# Altium PCB HMI MINI.PcbDoc
Units mm, origin at the board's own origin, x right, y up, seen from the top; angles counter-clockwise.
Board outline 60 x 15 mm, 4 copper layers (Top Layer, Layer 1, Layer 2, Bottom Layer), stack 1.513 mm thick; 36 components, 19 nets, 99 pads, 39 vias.
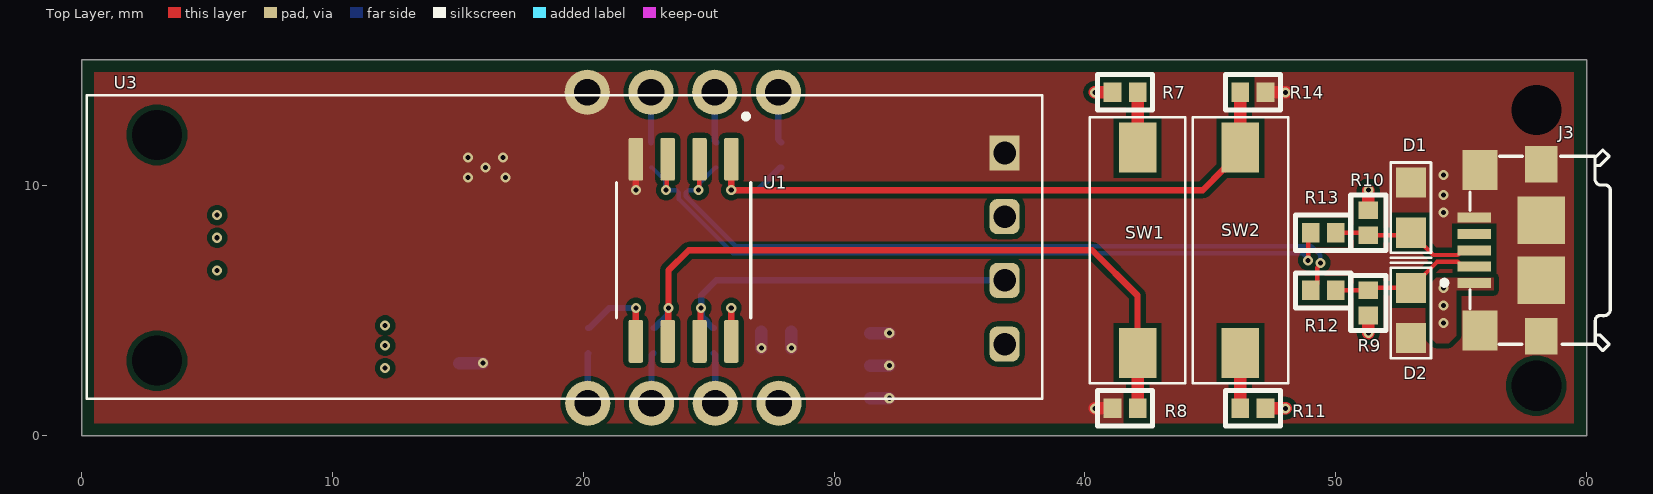
[diagram p0: Top Layer view]
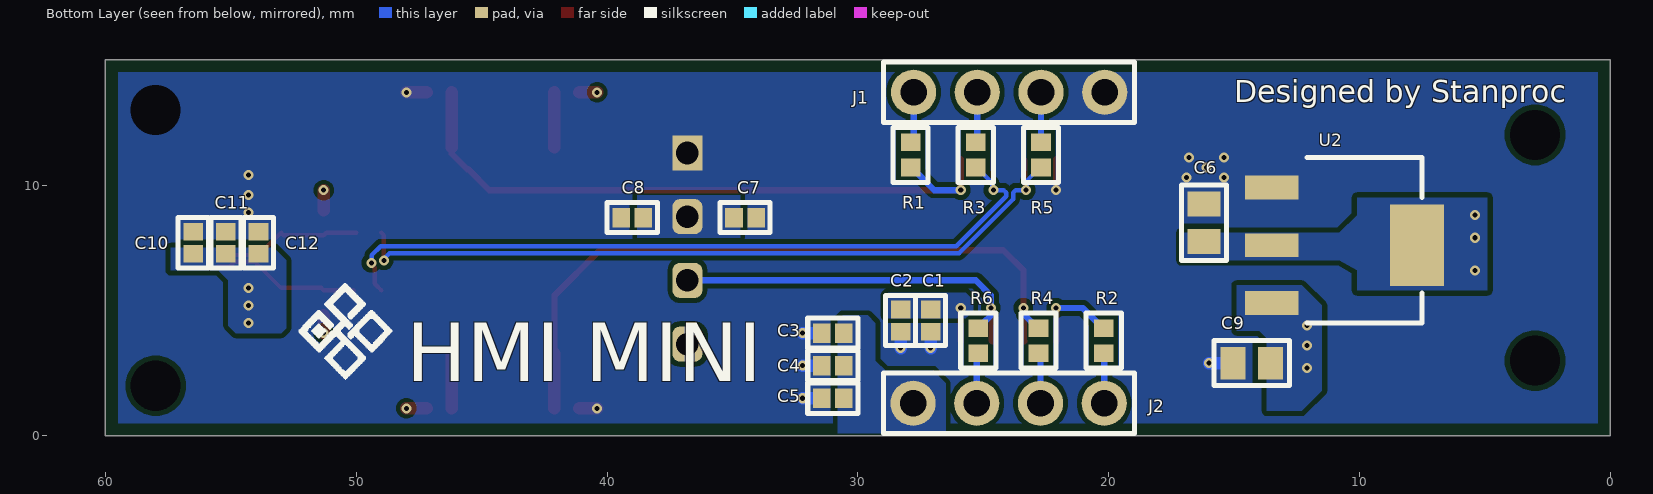
[diagram p1: Bottom Layer view, seen from below]
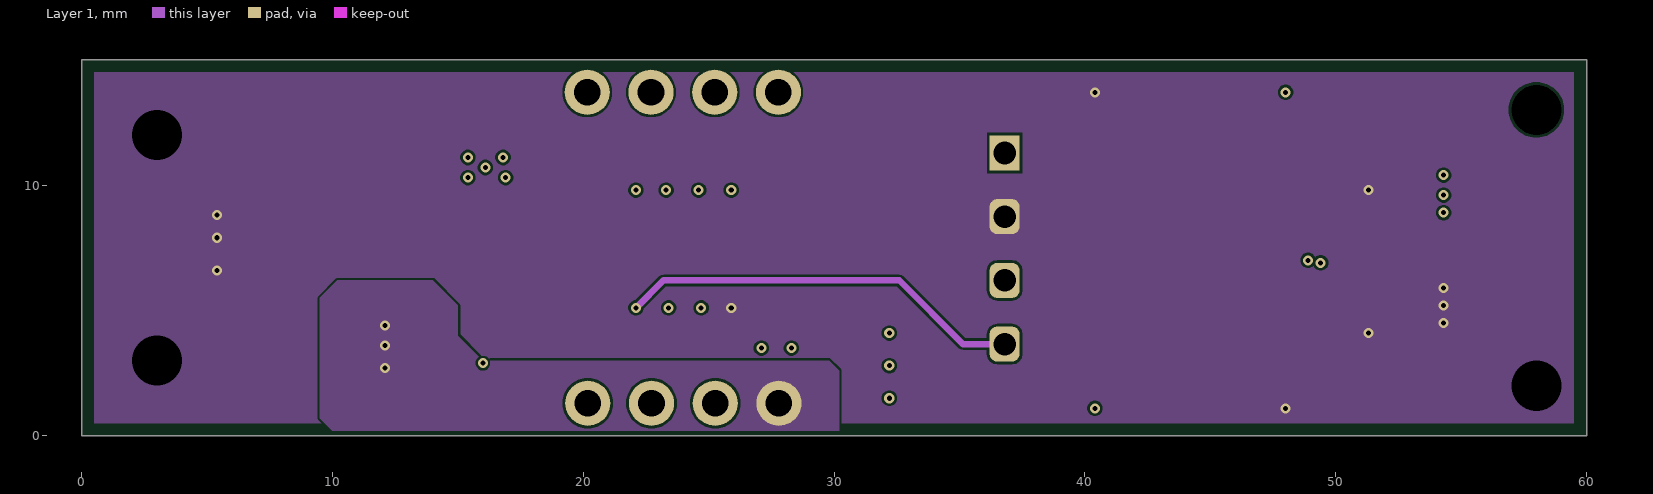
[diagram p2: Layer 1]
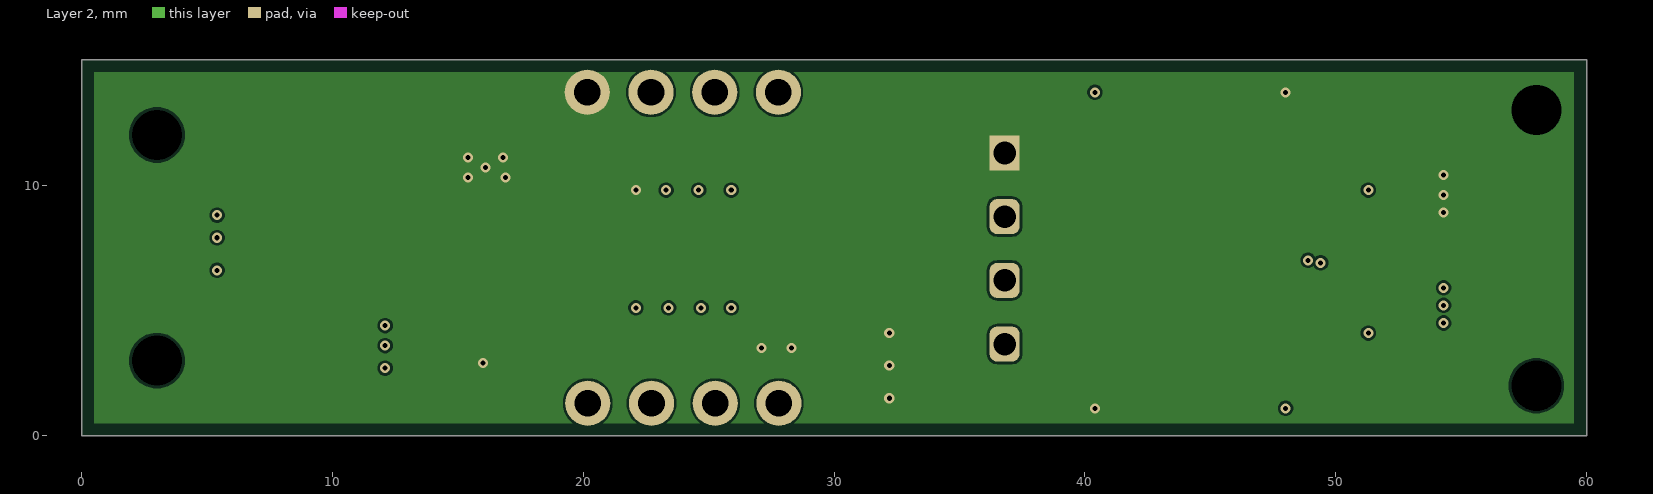
[diagram p3: Layer 2]
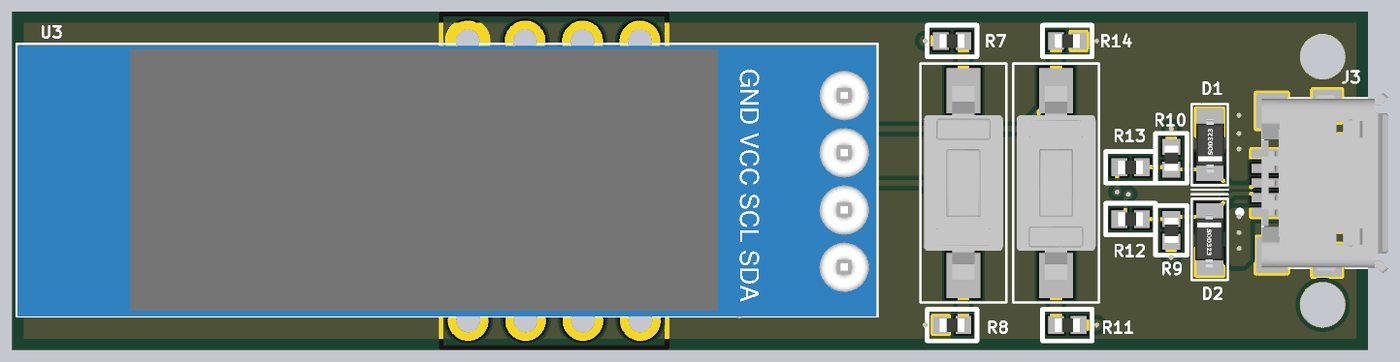
[diagram p4: 3D render of the assembled board from above, using the file's embedded part models]
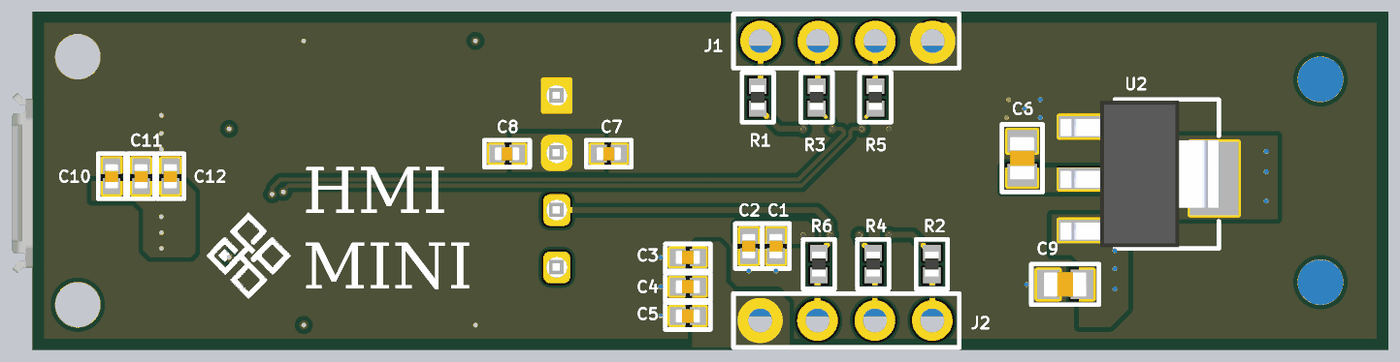
[diagram p5: 3D render of the assembled board from below, using the file's embedded part models]

## Layer stack, top to bottom
Top Solder: solder mask 0.0102, Solder Resist, Dk 3.5
Top Layer: signal copper 0.0356
Dielectric 2: prepreg 0.0711, PP-006, Dk 4.1
Layer 1: signal copper 0.0175
Dielectric 1: dielectric 1.265, FR-4, Dk 4.8
Layer 2: signal copper 0.0175
Dielectric 3: prepreg 0.0711, PP-006, Dk 4.1
Bottom Layer: signal copper 0.0356
Bottom Solder: solder mask 0.0102, Solder Resist, Dk 3.5

## Board outline
0,0 0,15 60,15 60,0

## Design rules (kind name [scope] priority, off if disabled: settings)
Clearance "TOP POLY" [InNamedPolygon('TOPGND')] p1: gap=0.2 ignorepadtopadclearanceinfootprint=FALSE
Clearance [All] p2: gap=0.1 ignorepadtopadclearanceinfootprint=FALSE
DiffPairsRouting [All] p1: maxlimit=0.101 minlimit=0.101 mostfreqgap=0.101 toplayer_minwidth=0.127 toplayer_maxwidth=0.175 toplayer_prefwidth=0.175 midlayer1_minwidth=0.127 midlayer1_maxwidth=0.175 midlayer1_prefwidth=0.175 midlayer2_minwidth=0.127 midlayer2_maxwidth=0.175 midlayer2_prefwidth=0.175 bottomlayer_minwidth=0.127 bottomlayer_maxwidth=0.175 bottomlayer_prefwidth=0.175 maxuncoupledlength=12.7
PolygonConnect [All] p1: connectstyle=Direct reliefconductorwidth=0.254 reliefentries=4 polygonreliefangle="90 Angle" airgapwidth=0.254
RoutingVias [All] p1: holewidth=0.711 width=1.27 viastyle="Through Hole" minholewidth=0.711 minwidth=1.27 maxholewidth=0.711 maxwidth=1.27
SolderMaskExpansion [All] p1: expansion=0.102 istentingtop=FALSE
Width [All] p1: maxlimit=5 minlimit=0.01 preferedwidth=0.254
29 further rules are at their usual default settings.

## Classes and differential pairs
net class USB: USB_N USB_P VUSB_N VUSB_P
differential pair VUSB: +VUSB_P -VUSB_N
differential pair USB: +USB_P -USB_N

## Components (designator, comment, footprint, x,y, rotation, side; value= is the part's Value field where it differs from the comment)
C1 "0.1uF(25V )" CAPACITOR_0402 27.1,4.6 r90 bottom
C2 "0.01uF(25V)" CAPACITOR_0402 28.3,4.6 r90 bottom
C3 "0.1uF(25V )" CAPACITOR_0402 31,4.1 r180 bottom
C4 "0.01uF(25V)" CAPACITOR_0402 31,2.8 r180 bottom
C5 "4.7uF(16V)" CAPACITOR_0402 31,1.5 r180 bottom
C6 "10uF(0603 in )" Capacitor_0603 16.2,8.5 r270 bottom
C7 "0.1uF(25V )" CAPACITOR_0402 34.5,8.7 r0 bottom
C8 "0.01uF(25V)" CAPACITOR_0402 39,8.7 r180 bottom
C9 "10uF(0603 in )" Capacitor_0603 14.3,2.9 r180 bottom
C10 "0.1uF(25V )" CAPACITOR_0402 56.5,7.7 r270 bottom
C11 "0.01uF(25V)" CAPACITOR_0402 55.2,7.7 r270 bottom
C12 "4.7uF(16V)" CAPACITOR_0402 53.9,7.7 r270 bottom
D1 "3.6V" SOD323_ZENER 53,9.1 r270 top
D2 "3.6V" SOD323_ZENER 53,4.9 r90 top
J1 "1x4HDR" P2.541X4HDR 27.78,13.7 r180 bottom
J2 "1x4HDR" P2.541X4HDR 20.18,1.3 r0 bottom
J3 "Micro USB" TE_1981568-1 58.2,7.4 r90 top
R1 "0R" RESISTOR_0402 27.9,11.2 r90 bottom
R2 "0R" RESISTOR_0402 20.2,3.8 r90 bottom
R3 "0R" RESISTOR_0402 25.3,11.2 r90 bottom
R4 "0R" RESISTOR_0402 22.8,3.8 r90 bottom
R5 "0R" RESISTOR_0402 22.7,11.2 r90 bottom
R6 "0R" RESISTOR_0402 25.2,3.8 r90 bottom
R7 "4.7K" RESISTOR_0402 41.6,13.7 r180 top
R8 "10K(0402 in )" RESISTOR_0402 41.6,1.1 r0 top
R9 "1.5K" RESISTOR_0402 51.3,5.3 r270 top
R10 "1.5K" RESISTOR_0402 51.3,8.5 r90 top
R11 "4.7K" RESISTOR_0402 46.7,1.1 r0 top
R12 "68R" RESISTOR_0402 49.5,5.8 r180 top
R13 "68R" RESISTOR_0402 49.5,8.1 r180 top
R14 "10K(0402 in )" RESISTOR_0402 46.7,13.7 r180 top
SW1 "Switch" Switch_2Lead 42.1,7.4 r90 top locked
SW2 "Switch" Switch_2Lead 46.2,7.4 r270 top locked
U1 "ATTINY85" SOIC127P798X216-8N 24,7.4 r270 top
U2 "5V REG" 4PIN-SOT 10.6,7.6 r270 bottom
U3 "I2C_OLED" "128X32 OLED" 36.8,11.28 r270 top

## Footprints (in the part's own frame and the unit in brackets; to place one, negate y for a bottom-side part, rotate by r counter-clockwise, add the part's x,y. Pads: shape width x height; smd on the part's side, far side on the other; paste and mask are expansions set on the pad)
4PIN-SOT [mm] "4 Pin Small Outline Package"
  rect 0.95x2.15 smd: 1(-2.3,-2.9) 2(0,-2.9) 3(2.3,-2.9)
  rect 3.25x2.15 smd: 4(0,2.9)
  silkscreen extent -3.5,-1.5 3.1,3.1, body extent -3.45,-3.9 3.05,3.1, height 1.8
"128X32 OLED" [mm]
  rect 1.4x1.2 hole 0.9: 1(0,0)
  rrect50% 1.4x1.2 hole 0.9: 2(2.54,0) 3(5.08,0) 4(7.62,0)
  silkscreen extent -2.3,-36.6 9.8,1.5, body extent -2.2,-36.57 9.8,1.43, height 7
CAPACITOR_0402 [mm] "0402 Capacitor"
  rect 0.7x0.78 smd: 1(-0.44,0) 2(0.44,0)
  silkscreen extent -1,-0.6 1,0.6, body extent -0.55,-0.3 0.55,0.3, height 0.5
Capacitor_0603 [mm] "Capacitor with 0603 (1608 Metric) Footprint"
  rect 1x1.3 smd: 1(-0.75,0) 2(0.75,0)
  silkscreen extent -1.5,-0.9 1.5,0.9, body extent -0.95,-0.55 0.95,0.55, height 0.8
P2.541X4HDR [mm]
  round 1.8 hole 1.06: 1(0,0) 2(2.54,0) 3(5.08,0) 4(7.62,0)
  silkscreen extent -1.2,-1.2 8.8,1.2
RESISTOR_0402 [mm] "0402 Resistor Package Footprint"
  rect 0.7x0.78 smd: 1(-0.5,0) 2(0.5,0)
  silkscreen extent -1.1,-0.7 1.1,0.7, body extent -0.55,-0.3 0.55,0.3, height 0.3
SOD323_ZENER [mm]
  rect 1.2x1.2 smd: 1(-1,0) 2(1,0)
  silkscreen extent -1.8,-0.8 2,0.8, body extent -1.25,-0.6 1.25,0.65, height 0.9
SOIC127P798X216-8N [mm]
  rrect25% 1.71x0.58 smd: 1(-3.63,1.905) 2(-3.63,0.635) 3(-3.63,-0.635) 4(-3.63,-1.905) 5(3.63,-1.905) 6(3.63,-0.635) 7(3.63,0.635) 8(3.63,1.905)
  silkscreen extent -5.44,-2.68 2.7,2.68, body extent -4.2,-2.69 4.2,2.69, height 2.3
Switch_2Lead [mm]
  rect 2x1.5 smd: 1(-4.1,0) 2(4.1,0)
  silkscreen extent -5.3,-1.9 5.3,1.9, body extent -4.3,-1.75 4.3,1.75, height 4.3
TE_1981568-1 [mm]
  rect 0.4x1.35 smd: 1(-1.3,2.675) 2(-0.65,2.675) 3(0,2.675) 4(0.65,2.675) 5(1.3,2.675)
  rect 1.6x1.4 smd: 6(-3.2,2.45) 7(3.2,2.45)
  rect 1.45x1.3 smd: 8(3.425,0) 9(-3.425,0)
  rect 1.9x1.9 smd: 10(-1.2,0) 11(1.2,0)
  silkscreen extent -4,-2.75 4,3.97, body extent -4,-2.7 4,2.9, height 2.82

## Part data
C1 C3 C7 C10: library part GRM155R71E104KE14J, "0.1µF ±10% 25V Ceramic Capacitor X7R 0402 (1005 Metric)", Manufacturer="Murata Electronics", MaxTemp=125°C, MinTemp=-55°C, SupplierPartNumber=490-14603-1-ND, ComponentLink1Description=SupplierURL, ComponentLink1URL=https://www.digikey.com/en/products/detail/murata-electronics/GRM155R71E104KE14J/4905174, ManufacturerPartNumber=GRM155R71E104KE14J, PartStatus=Active, Price=0.10, Supplier=Digikey
C2 C4 C8 C11: library part C0402C103J3RACTU, "10000pF ±5% 25V Ceramic Capacitor X7R 0402 (1005 Metric)", Manufacturer=KEMET, MaxTemp=125°C, MinTemp=-55°C, SupplierPartNumber=399-1279-1-ND, ComponentLink1Description=SupplierURL, ComponentLink1URL=https://www.digikey.com/en/products/detail/kemet/C0402C103J3RACTU/416042, ManufacturerPartNumber=C0402C103J3RACTU, PartStatus=Active, Price=0.10, Supplier=Digikey
C5 C12: library part 0402YD475MAT2A, "4.7µF ±20% 16V Ceramic Capacitor X5R 0402 (1005 Metric)", Manufacturer="AVX Corporation", MaxTemp=85°C, MinTemp=-55°C, SupplierPartNumber=478-10788-1-ND, ComponentLink1Description=SupplierURL, ComponentLink1URL=https://www.digikey.com/en/products/detail/avx-corporation/0402YD475MAT2A/6221357, ManufacturerPartNumber=0402YD475MAT2A, PartStatus=Active, Price=0.29, Supplier=Digikey
C6 C9: library part GRM188R61E106KA73D, "10µF ±10% 25V Ceramic Capacitor X5R 0603 (1608 Metric)", Manufacturer="Murata Electronics", MaxTemp=85°C, MinTemp=-55°C, SupplierPartNumber=490-18214-1-ND, ComponentLink1Description=SupplierURL, ComponentLink1URL=https://www.digikey.com/en/products/detail/murata-electronics/GRM188R61E106KA73D/9867922, ManufacturerPartNumber=GRM188R61E106KA73D, PartStatus=Active, Price=0.32, Supplier=Digikey
D1 D2: library part BZM55B3V6-TR, "Zener Diode 3.6V 500mW  Surface Mount MicroMELF", Manufacturer="Vishay General Semiconductor - Diodes Division", MaxTemp=175°C, MinTemp=-65°C, SupplierPartNumber=112-BZM55B3V6-CT-ND, ComponentLink1Description=SupplierURL, ComponentLink1URL=https://www.digikey.com/en/products/detail/vishay-general-semiconductor-diodes-division/BZM55B3V6-TR/4830627, ManufacturerPartNumber=BZM55B3V6-TR, PartStatus=Active, Price=0.28, Supplier=Digikey
J1 J2: library part PEC04SAAN, "Connector Header Through Hole 4 position 0.100\" (2.54mm)", MaxTemp=125°C, MinTemp=-65°C, SupplierPartNumber=S1012E-04-ND, ComponentLink1Description=SupplierURL, ComponentLink1URL=https://www.digikey.com/en/products/detail/sullins-connector-solutions/PEC04SAAN/859157, Maanufacturer="Sullins Connector Solutions", ManufacturerPartNumber=PEC04SAAN, PartStatus=Active, Price=0.27, Supplier=Digikey
J3: library part 1981568-1, "USB - micro B USB 2.0 Receptacle Connector 5 Position Surface Mount, Right Angle", Manufacturer="TE Connectivity AMP Connectors", MaxTemp=85°C, MinTemp=-30°C, SupplierPartNumber=A97800CT-ND, ComponentLink1Description=SupplierURL, ComponentLink1URL=https://www.digikey.com/en/products/detail/te-connectivity-amp-connectors/1981568-1/1786248, ManufacturerPartNumber=1981568-1, PartStatus=Active, Price=1.71, Supplier=Digikey
R1 R2 R3 R4 R5 R6: library part CR0402AJ/-000GAS, "Jumper 0.063W, 1/16W Chip Resistor 0402 (1005 Metric) Anti-Sulfur, Automotive AEC-Q200, Moisture Resistant Thick Film", Manufacturer="Bourns Inc.", MaxTemp=155°C, MinTemp=-55°C, SupplierPartNumber=CR0402AJ/-000GASCT-ND, ComponentLink1Description=SupplierURL, ComponentLink1URL=https://www.digikey.com/en/products/detail/bourns-inc/CR0402AJ-000GAS/10240110, ManufacturerPartNumber=CR0402AJ/-000GAS, PartStatus=Active, Price=0.10, Supplier=Digikey
R7 R11: library part ERJ-U02J472X, "4.7 kOhms ±5% 0.1W, 1/10W Chip Resistor 0402 (1005 Metric) Anti-Sulfur, Automotive AEC-Q200 Thick Film", Manufacturer="Panasonic Electronic Components", MaxTemp=155°C, MinTemp=-55°C, SupplierPartNumber=10-ERJ-U02J472XCT-ND, ComponentLink1Description=SupplierURL, ComponentLink1URL=https://www.digikey.com/en/products/detail/panasonic-electronic-components/ERJ-U02J472X/11631055, ManufacturerPartNumber=ERJ-U02J472X, PartStatus=Active, Price=0.10, Supplier=Digikey
R8 R14: library part ERJ-U02J103X, "10 kOhms ±5% 0.1W, 1/10W Chip Resistor 0402 (1005 Metric) Anti-Sulfur, Automotive AEC-Q200 Thick Film", Manufacturer="Panasonic Electronic Components", MaxTemp=155°C, MinTemp=-55°C, SupplierPartNumber=10-ERJ-U02J103XCT-ND, ComponentLink1Description=SupplierURL, ComponentLink1URL=https://www.digikey.com/en/products/detail/panasonic-electronic-components/ERJ-U02J103X/11631335, ManufacturerPartNumber=ERJ-U02J103X, PartStatus=Active, Price=0.10, Supplier=Digikey
R9 R10: library part ERJ-U02J152X, "1.5 kOhms ±5% 0.1W, 1/10W Chip Resistor 0402 (1005 Metric) Anti-Sulfur, Automotive AEC-Q200 Thick Film", Manufacturer="Panasonic Electronic Components", MaxTemp=155°C, MinTemp=-55°C, SupplierPartNumber=10-ERJ-U02J152XCT-ND, ComponentLink1Description=SupplierURL, ComponentLink1URL=https://www.digikey.com/en/products/detail/panasonic-electronic-components/ERJ-U02J152X/11634723, ManufacturerPartNumber=ERJ-U02J152X, PartStatus=Active, Price=0.10, Supplier=Digikey
R12 R13: library part CRGCQ0402J68R, "68 Ohms ±5% 0.063W, 1/16W Chip Resistor 0402 (1005 Metric) Automotive AEC-Q200, Moisture Resistant Thick Film", Manufacturer="TE Connectivity Passive Product", MaxTemp=155°C, MinTemp=-55°C, SupplierPartNumber=A130041CT-ND, ComponentLink1Description=SupplierURL, ComponentLink1URL=https://www.digikey.com/en/products/detail/te-connectivity-passive-product/CRGCQ0402J68R/8576643, ManufacturerPartNumber=CRGCQ0402J68R, PartStatus=Active, Price=0.10, Supplier=Digikey
SW1 SW2: library part "PTS636 SK50 SMTR LFS", "Tactile Switch SPST-NO Top Actuated Surface Mount", Manufacturer=C&K, MaxTemp=70°C, MinTemp=-20°C, SupplierPartNumber=CKN12315-1-ND, ComponentLink1Description=SupplierURL, ComponentLink1URL=https://www.digikey.com/en/products/detail/c-k/PTS636-SK50-SMTR-LFS/10071728, ManufacturerPartNumber="PTS636 SK50 SMTR LFS", PartStatus=Active, Price=0.12, Supplier=Digikey
U1: library part ATTINY85V-10SU, "AVR series Microcontroller IC 8-Bit 10MHz 8KB (4K x 16) FLASH 8-SOIC", Manufacturer="Microchip Technology", MaxTemp=85°C, MinTemp=-40°C, SupplierPartNumber=ATTINY85V-10SU-ND, ComponentLink1Description=SupplierURL, ComponentLink1URL=https://www.digikey.com/en/products/detail/microchip-technology/ATTINY85V-10SU/735472, ManufacturerPartNumber=ATTINY85V-10SU, PartSatus=Active, Price=1.31, Supplier=Digikey
U2: library part LM1117IMP-5.0/NOPB, "Linear Voltage Regulator IC Positive Fixed 1 Output  800mA SOT-223", Manufacturer="Texas Instruments", MaxTemp=125°C, MinTemp=-40°C, SupplierPartNumber=LM1117IMP-5.0/NOPBCT-ND, ComponentLink1Description=SupplierURL, ComponentLink1URL=https://www.digikey.com/en/products/detail/texas-instruments/LM1117IMP-5-0-NOPB/482940, ManufacturerPartNumber=LM1117IMP-5.0/NOPB, PartStatus=Active, Price=1.17, Supplier=Digikey
U3: library part I2COLED, ComponentLink1Description=SupplierURL, ComponentLink1URL=https://www.amazon.in/xcluma-Display-SSD1306-Driver-Module/dp/B07966FNMN

## Free pads (board coordinates)
  round 0 hole 2: ""(3,3) ""(3,12) ""(58,2) ""(58,13)

## Via types
v1: diameter 0.4/0.4/0.4/0.4 (per signal layer), hole 0.2, Top Layer to Bottom Layer, tented both sides, 39 vias

## Nets (pads, with @x,y where several pads share a name; then routed paths per layer and width w, separated by ;. In a path a pad name is that pad's centre, name@x,y a point inside that pad or via, vN(x,y) a via of type N, cw(c..) or ccw(c..) an arc to the next point about the centre after c; other vN are vias at no path point)
+5V: C1.2 C2.2 C6.2 C7.2 C8.2 C10.2 C11.2 C12.2 J3.1 pad.@3,3 pad.@3,12 pad.@58,2 R7.2 R9.2 R10.2 R11.2 U1.8 U2.2 U2.4 U3.2 | length 4.3
  Top Layer w0.254: v1(25.9,5.1) 25.903,5.097 25.903,3.772 U1.8
  Top Layer w0.5: v1(40.4,13.7) R7.2 ; R11.2 v1(48,1.1) ; v1(51.3,4.1) R9.2 ; R10.2 v1(51.3,9.8)
  other v1: 54.3,4.5 54.3,5.2 54.3,5.9 5.4,6.6 5.4,7.9 5.4,8.8
GND: C1.1 C2.1 C3.1 C4.1 C5.1 C6.1 C7.1 C8.1 C9.1 C10.1 C11.1 C12.1 D1.1 D2.1 J1.4 J3.5 J3.6 J3.7 J3.8 J3.9 J3.10 J3.11 pad.@58,13 R8.1 R14.1 U1.4 U2.1 U3.1 | length 7.3
  Top Layer w0.254: U1.4 22.097,11.028 22.097,9.803 v1(22.1,9.8)
  Top Layer w0.5: v1(40.4,1.1) R8.1 ; R14.1 v1(48,13.7)
  Bottom Layer w0.5: C9.1 v1(16,2.9) ; v1(27.1,3.5) C1.1 ; v1(28.3,3.5) C2.1 ; C5.1 v1(32.2,1.5) ; C4.1 v1(32.2,2.8) ; C3.1 v1(32.2,4.1)
  other v1: 54.3,8.9 54.3,9.6 15.4,10.3 16.9,10.3 54.3,10.4 16.1,10.7 15.4,11.1 16.8,11.1
I2C_SCL: R6.2 U1.7 U3.3 | length 15.2
  Top Layer w0.254: U1.7 24.672,3.807 24.672,5.072 v1(24.7,5.1)
  Bottom Layer w0.254: R6.2 25.16,4.3 24.937,4.523 24.937,4.563 24.728,4.772 24.728,5.072 v1(24.7,5.1) 24.7,5.6 25.3,6.2 U3.3
I2C_SDA: R2.2 U1.5 U3.4 | length 19.8
  Top Layer w0.254: U1.5 22.097,3.772 22.097,5.098 v1(22.1,5.1)
  Layer 1 w0.254: v1(22.1,5.1) 23.2,6.2 32.6,6.2 35.14,3.66 U3.4
  Bottom Layer w0.254: R2.2 20.24,4.3 21.04,5.1 v1(22.1,5.1)
NetJ1_1: J1.1 R1.2 | length 2
  Bottom Layer w0.254: J1.1 27.78,11.82 R1.2
NetJ1_2: J1.2 R3.2 | length 2
  Bottom Layer w0.254: J1.2 25.24,11.76 R3.2
NetJ1_3: J1.3 R5.2 | length 2
  Bottom Layer w0.254: R5.2 J1.3
NetJ2_1: J2.1 R2.1 | length 2
  Bottom Layer w0.254: J2.1 20.18,3.28 R2.1
NetJ2_2: J2.2 R4.1 | length 2
  Bottom Layer w0.254: J2.2 22.72,3.22 R4.1
NetJ2_3: J2.3 R6.1 | length 2
  Bottom Layer w0.254: R6.1 25.26,3.24 J2.3
NetR7_1: R7.1 SW1.2 | length 2.2
  Top Layer w0.5: SW1.2 R7.1
NetR11_1: R11.1 SW2.2 | length 2.2
  Top Layer w0.5: R11.1 SW2.2
SWITCH_1: R4.2 R8.2 SW1.1 U1.6 | length 28.2
  Top Layer w0.254: U1.6 23.383,3.788 23.383,5.083 v1(23.4,5.1) 23.4,6.6 24.2,7.4 40.3,7.4 42.1,5.6 SW1.1
  Top Layer w0.5: R8.2 SW1.1
  Bottom Layer w0.254: R4.2 22.84,4.3 23.372,4.832 23.372,5.072 v1(23.4,5.1)
SWITCH_2: R1.1 R14.2 SW2.1 U1.1 | length 27
  Top Layer w0.254: U1.1 25.903,11.028 25.903,9.803 v1(25.9,9.8) 44.7,9.8 45.527,10.627 45.577,10.627 46.2,11.25 SW2.1
  Top Layer w0.5: SW2.1 R14.2
  Bottom Layer w0.254: v1(25.9,9.8) 26.96,9.8 27.86,10.7 R1.1
USB_N: D2.2 J3.2 R9.1 R12.1 | length 6
  Top Layer w0.175: R12.1@50.1,5.8 R9.1 51.4,5.9 D2.2 54.037,6.937 54.863,6.937 55.05,6.75 J3.2
USB_P: D1.2 J3.3 R10.1 R13.1 | length 6.1
  Top Layer w0.175: R13.1 51.2,8.1 R10.1 52.9,8 D1.2 53.887,7.213 54.863,7.213 55.05,7.4 J3.3
VIN: C3.2 C4.2 C5.2 C9.2 J2.4 U2.3
  other v1: 12.1,2.7 12.1,3.6 12.1,4.4
VUSB_N: R3.1 R12.2 U1.2 | length 31
  Top Layer w0.175: v1(24.6,9.8) 24.617,9.818 24.617,11.013 U1.2 ; R12.2 49.262,6.063 49.262,6.702 49.4,6.839 v1(49.4,6.9)
  Bottom Layer w0.175: R3.1 25.26,10.7 24.643,10.083 24.643,9.843 v1(24.6,9.8) 24.191,9.8 24.088,9.697 24.088,9.553 26.08,7.561 49.029,7.561 49.39,7.2 49.39,6.91 v1(49.4,6.9)
VUSB_P: R5.1 R13.2 U1.3 | length 31.2
  Top Layer w0.175: v1(23.3,9.8) 23.333,9.833 23.333,10.998 U1.3 U1.3@23.365,10.465 ; v1(48.9,7) R13.2@48.9,8 ; R13.2@48.9,8 R13.2 R13.2@48.9,8
  Bottom Layer w0.175: R5.1 22.74,10.7 23.257,10.183 23.257,9.843 v1(23.3,9.8) 23.709,9.8 23.812,9.697 23.812,9.438 25.965,7.285 48.676,7.285 48.9,7.061 v1(48.9,7)
pads on no net: J3.4

## Polygon pours and split planes (outlines as drawn)
GND on Top Layer "TOPGND" (solid, pour order 14): 0.5,0.5 0.5,14.5 59.5,14.5 59.5,0.5
+5V on Top Layer "TestPoly" (solid, pour order 0): 56.3,6.3 54,6.3 53.8,6.1 53.8,3.9 54,3.7 54.5,3.7 54.8,4 54.8,5.8 56.3,5.8
GND on Bottom Layer "TOPGND" (solid, pour order 15): 0.5,0.5 0.5,14.5 59.5,14.5 59.5,0.5
GND on Bottom Layer "TestPoly" (solid, pour order 13): 53.3,11.3 53.3,8 57.2,8 57.4,8.2 57.4,11.3
+5V on Bottom Layer "TestPoly" (solid, pour order 12): 57.4,7.5 53.3,7.5 52.8,7 52.8,4.3 53,4.1 54.8,4.1 55.1,4.4 55.1,6.2 55.5,6.6 57.4,6.6
GND on Bottom Layer "TestPoly" (solid, pour order 7): 34.3,7.9 33.6,7.9 33.6,12 34.1,12.5 39.6,12.5 39.9,12.2 39.9,8.1 39.2,8.1 39.2,9.6 38.9,9.9 38.7,9.9 34.6,9.9 34.3,9.6
GND on Bottom Layer "TestPoly" (solid, pour order 6): 17.5,12 12.4,12 11.8,11.4 11.8,9.3 12.3,8.8 17.4,8.8 17.5,8.9
VIN on Bottom Layer "TestPoly" (solid, pour order 5): 12.3,6 11.5,5.2 11.5,1.8 12.3,1 13.7,1 13.7,3.9 14,4.2 14.9,4.2 14.9,6
+5V on Bottom Layer "TestPoly" (solid, pour order 4): 17.1,8.1 10.8,8.1 10.1,8.8 10.1,9.5 4.9,9.5 4.9,5.8 10.1,5.8 10.1,6.6 10.8,7 17.1,7
+5V on Bottom Layer "TestPoly" (solid, pour order 3): 34.7,9.6 34.7,7.9 38.8,7.9 38.8,9.6
VIN on Bottom Layer "TestPoly" (solid, pour order 2): 27,2.6 26.5,2.1 26.5,0.2 26.6,0.1 30.8,0.1 30.8,4.6 30.6,4.8 29.6,4.8 29.3,4.5 29.3,3 28.9,2.6
+5V on Bottom Layer "TestPoly" (solid, pour order 1): 25.7,5.7 25.4,5.4 25.4,5 25.7,4.7 28.8,4.7 28.9,4.8 28.9,5.6 28.8,5.7
+5V on Layer 1 "TestPoly" (solid, pour order 10): 0.5,0.5 0.5,14.5 59.5,14.5 59.5,0.5
VIN on Layer 1 "TestPoly" (solid, pour order 9): 30.2,0.2 10,0.2 9.5,0.7 9.5,5.5 10.2,6.2 14,6.2 15,5.2 15,4 16,3 29.8,3 30.2,2.6
GND on Layer 2 "TestPoly" (solid, pour order 8): 0.5,0.5 0.5,14.5 59.5,14.5 59.5,0.5

## Silkscreen, mask and mechanical layers (free items; w line width, h text height)
Bottom Overlay:
  drawing of 3 lines, arcs and shapes, not listed
  text "Designed by Stanproc" at 15,13 h1.5
  text "HMI MINI" at 48,1.4 h4

## Text inside footprints (layer, text, board x,y; h text height)
J3: Mechanical 13 "PCB EDGE" at 60.226,6.256 h0.41 r90